# EAGLE board HomeAutomation (EAGLE 9.6.2)
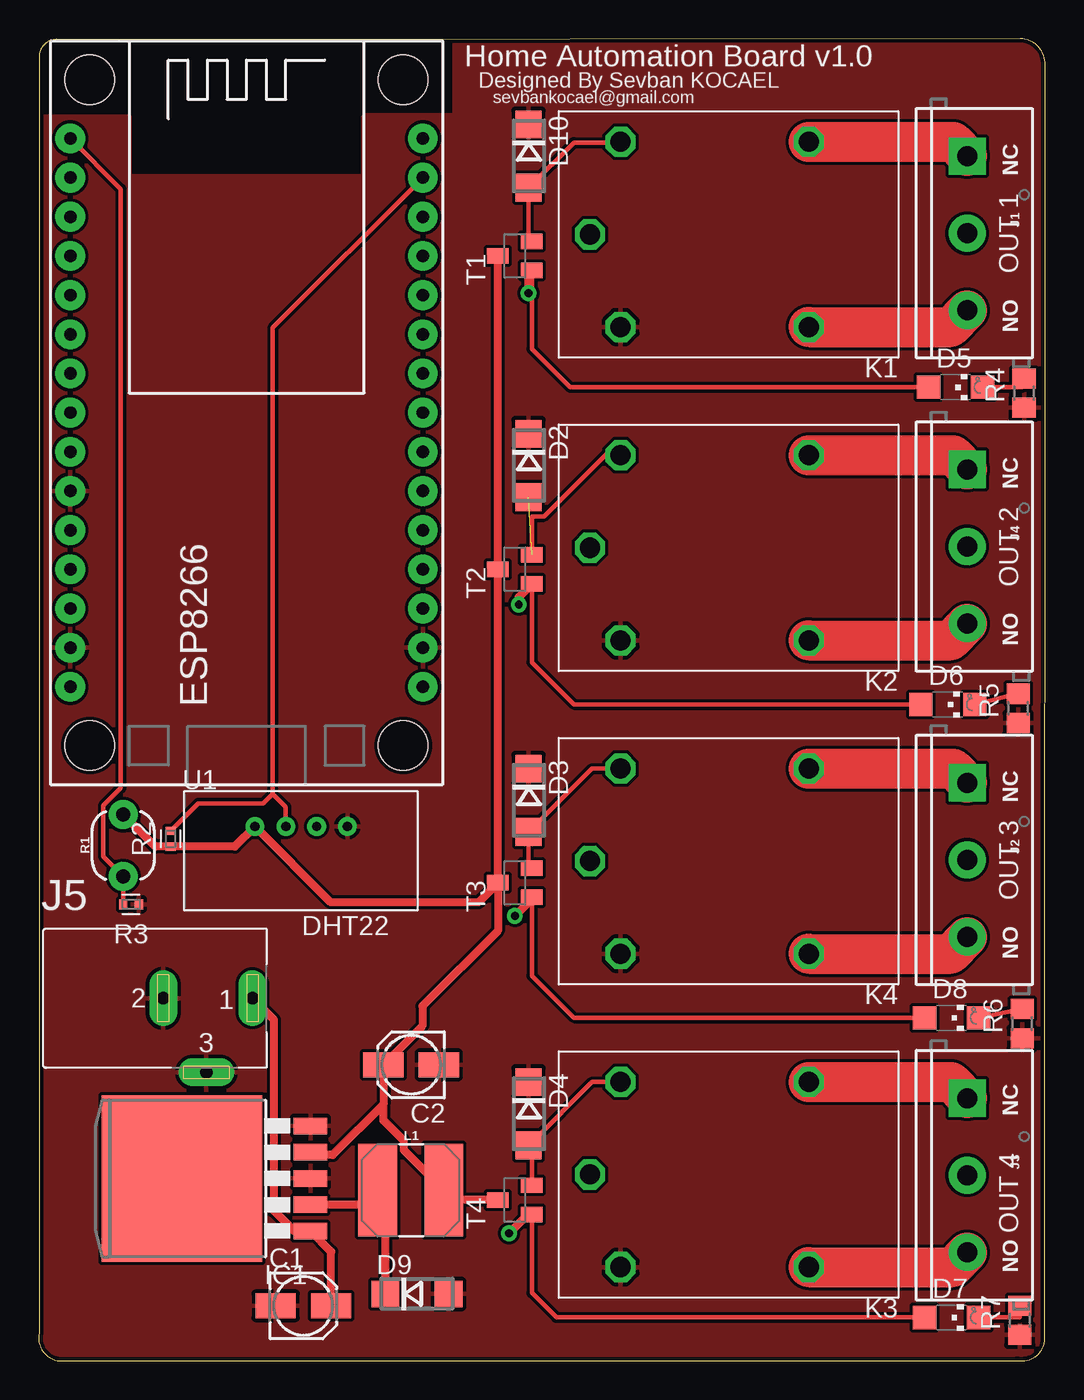
[diagram p0: board, top side]
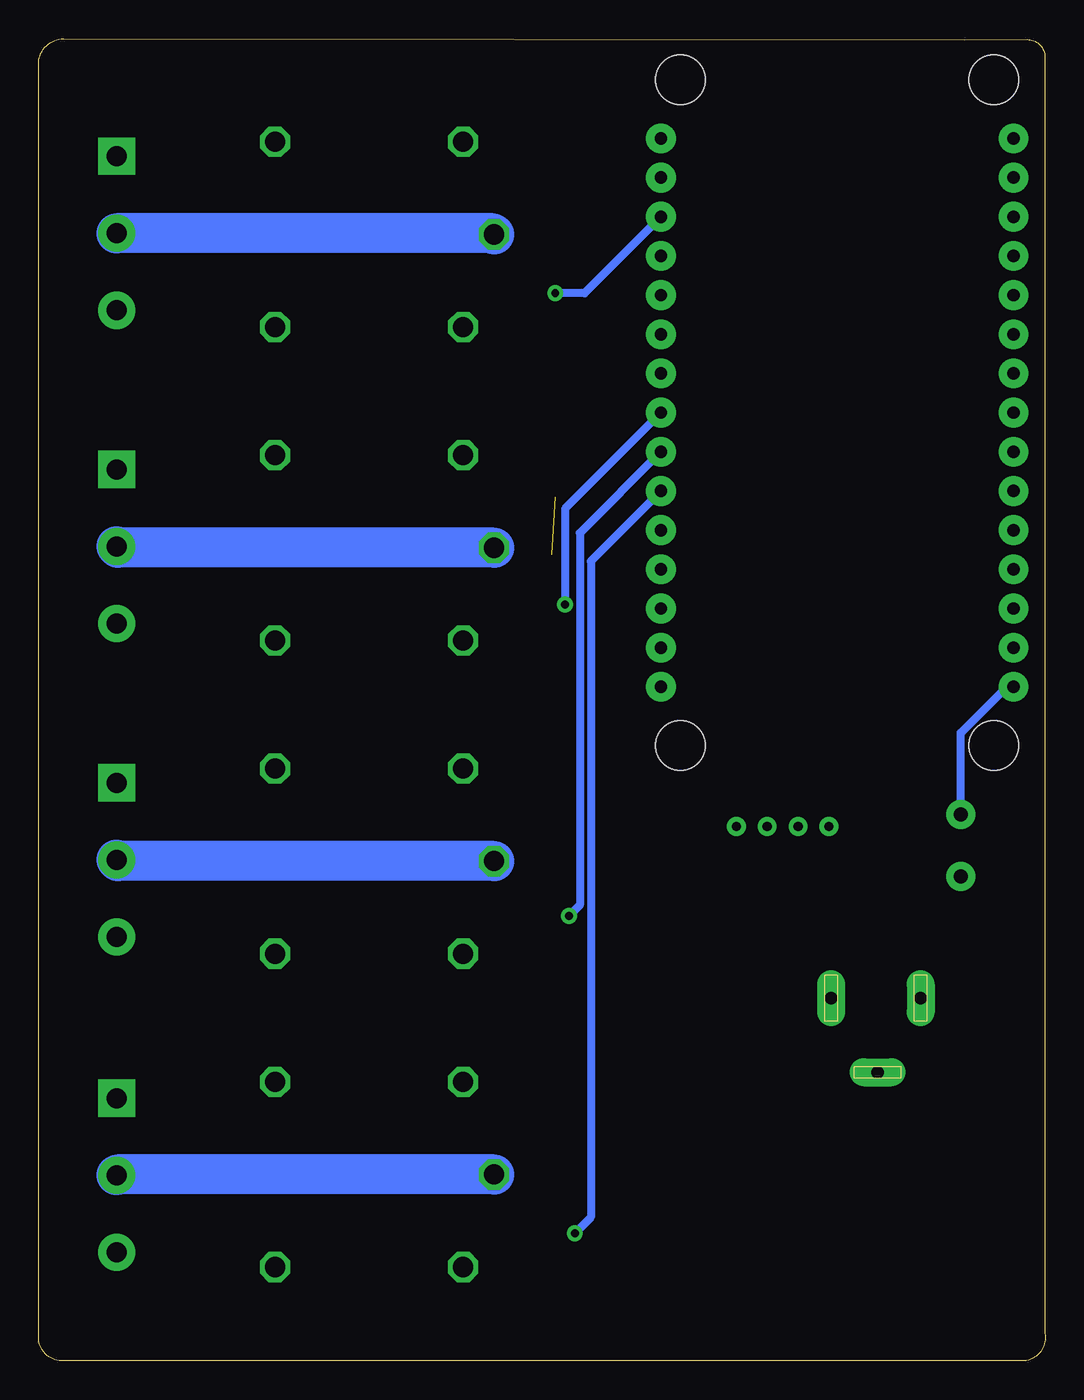
[diagram p1: board, bottom side, seen from below]

Size 65.29 x 85.75 mm. Coordinates in mm from the lower left corner, seen from the top.
Outline: 5.24,85.67 1.18,85.69 arc90 0.03,84.55 0.03,1.8 arc90 1.22,0.02 63.43,0.02 63.51,0.01 arc88 65.26,1.26 65.29,84.04 arc90 63.66,85.75 5.24,85.67
Copper layers (1*16): Top 0.035mm / dielectric 1.5mm / Bottom 0.035mm
Design rules "SparkFun": minimum track width 8mil, minimum drill 20mil, track to track 8mil, track to pad 8mil, pad to pad 8mil, via to via 8mil, smd to smd 8mil, copper to edge 10mil, drill to drill 8mil, minimum pad ring 12mil, minimum via ring 10mil, stop-mask expansion 4mil, vias tented up to drill 25mil, thermal gap 10mil

## Footprints (pad centres in the part's own frame; a part is rotated, then mirrored left to right if it is on the bottom)
153CLV-0405 = smd 2.6 x 1.6: + 1.8,0; - -1.8,0
DO214AC = smd 1.8 x 1.7: A 2.05,0; C -2.05,0
CHIPLED_1206 = smd 1.5 x 1.5: A 0,-1.75; C 0,1.75
ESP12E_DEVKIT = drill 0.8 pad 1.93: 3V3@0 -11.43,-7.62; 3V3@1 11.43,5.08; 3V3@2 11.43,-17.78; AD0 -11.43,17.78; CLK -11.43,-2.54; CMD -11.43,2.54; D0 11.43,17.78; D1 11.43,15.24; D2 11.43,12.7; D3 11.43,10.16; D4 11.43,7.62; D5 11.43,0; D6 11.43,-2.54; D7 11.43,-5.08; D8 11.43,-7.62; EN -11.43,-10.16; GND@0 -11.43,-5.08; GND@1 -11.43,-15.24; GND@2 11.43,2.54; GND@3 11.43,-15.24; RST -11.43,-12.7; RSV@0 -11.43,15.24; RSV@1 -11.43,12.7; RX 11.43,-10.16; SD0 -11.43,0; SD1 -11.43,5.08; SD2 -11.43,7.62; SD3 -11.43,10.16; TX 11.43,-12.7; VIN -11.43,-17.78 | hole 3.2: -10.16,21.59; 10.16,21.59; 10.16,-21.59; -10.16,-21.59
TO263-5 = smd 1.067 x 2.159: 1 -3.404,-5.791; 2 -1.702,-5.791; 3 0,-5.791; 4 1.702,-5.791; 5 3.404,-5.791 | smd 10.8 x 10.41: 6 0,2.54
SCREWTERMINAL-5MM-3 = drill 1.3 pad 2.413 square: 1 0,0 | drill 1.3 pad 2.413: 2 5,0; 3 10,0
694106301002 = drill 0.8 pad 1.8 long: 1 13.6,0; 2 7.8,0; 3 10.6,-4.8
SIEMENS_V23082_RELAY = drill 1.3 octagon: P$1 8,-6; P$2 8,6; P$3 10,0; P$4 -4.2,6; P$5 -4.2,-6
SRN6045 = smd 2.5 x 6: 1 -2.175,0; 2 2.125,0
PHOTOCELL-KIT = drill 0.9 pad 1.88: 1 -2,0; 2 2,0
RESC1005X40 = smd 0.535 x 0.644: 1 -0.507,0; 2 0.507,0
R0805 = smd 1.3 x 1.5: 1 -0.95,0; 2 0.95,0
SOT23-BEC = smd 1 x 1.4: B -0.95,-1.1; C 0,1.1; E 0.95,-1.1
DHT22 = drill 0.6: 1 -2,2; 2 0,2; 3 2,2; 4 4,2

## Placement (x,y rotation side)
C1  680uf  [153CLV-0405]  17.17,3.58 0 top
C2  220uF  [153CLV-0405]  24.16,19.2 180 top
D2  1N4007  [DO214AC]  31.78,58.06 270 top
D3  1N4007  [DO214AC]  31.78,36.34 270 top
D4  1N4007  [DO214AC]  31.78,16.02 270 top
D5  OUT 1  [CHIPLED_1206]  59.46,63.14 270 top
D6  OUT 2  [CHIPLED_1206]  58.96,42.57 270 top
D7  OUT 4  [CHIPLED_1206]  59.21,2.82 270 top
D8  OUT 3  [CHIPLED_1206]  59.21,22.25 270 top
D9  B340A-E3/61T  [DO214AC]  24.54,4.34 0 top
D10  1N4007  [DO214AC]  31.78,78.13 270 top
ESP8266  ESP12E_DEVKIT  [ESP12E_DEVKIT]  13.49,61.49 0 top
IC1  LM2596S  [TO263-5]  11.84,11.83 90 top
J1  OUT 1  [SCREWTERMINAL-5MM-3]  60.23,78.13 270 top
J2  OUT 3  [SCREWTERMINAL-5MM-3]  60.23,37.49 270 top
J3  OUT 4  [SCREWTERMINAL-5MM-3]  60.23,17.04 270 top
J4  OUT 2  [SCREWTERMINAL-5MM-3]  60.23,57.81 270 top
J5  694106301002  [694106301002]  0.28,23.52 0 top
K1  SIEMENS_V23082  [SIEMENS_V23082_RELAY]  45.75,73.05 180 top
K2  SIEMENS_V23082  [SIEMENS_V23082_RELAY]  45.75,52.73 180 top
K3  SIEMENS_V23082  [SIEMENS_V23082_RELAY]  45.75,12.09 180 top
K4  SIEMENS_V23082  [SIEMENS_V23082_RELAY]  45.75,32.41 180 top
L1  33µH/±20%/1.4A  [SRN6045]  24.16,11.07 0 top
R1  PHOTOCELLPTH-KIT  [PHOTOCELL-KIT]  5.49,33.42 90 top
R2  1k  [RESC1005X40]  8.56,33.85 90 top
R3  10k  [RESC1005X40]  6,29.61 180 top
R4  330  [R0805]  63.91,62.76 90 top
R5  330  [R0805]  63.53,42.31 90 top
R6  330  [R0805]  63.78,21.87 90 top
R7  330  [R0805]  63.63,2.64 90 top
T1  2N2222  [SOT23-BEC]  30.89,71.65 90 top
T2  2N2222  [SOT23-BEC]  30.89,51.33 90 top
T3  2N2222  [SOT23-BEC]  30.89,31.01 90 top
T4  2N2222  [SOT23-BEC]  30.89,10.44 90 top
U1  DHT22  [DHT22]  16.03,32.66 0 top

## Library data of the parts
C1 C2 = rcl; SPICEPREFIX: C
D2-D4 D9 D10 = diode
D5-D8 = led
ESP8266 = esp8266
IC1 = national-semiconductor; MF: NATIONAL SEMICONDUCTOR; MPN: LM2596S-ADJ/NOPB; OC_FARNELL: 9494367; OC_NEWARK: 41K3842
J1-J4 = SparkFun-Connectors; PROD_ID: CONN-10134; SF_SKU: PRT-08433
J5 = DC Power Jacks; CREATED_BY: PCBLayout.com; DIGIKEY_PART_NUMBER: 732-5930-ND; MANUFACTURER: Wurth Electronics Inc.; MPN: 694106301002
K1-K4 U1 = LezzetliRobotTarifleri
L1 = SparkFun-Coils; PROD_ID: NDUC-11627
R1 = SparkFun-Sensors; PROD_ID: COMP-09129; SF_ID: SEN-09088
R2 R3 = Resistor; CATEGORY: Resistor; SUB-CATEGORY: Fixed
R4-R7 = rcl; SPICEPREFIX: R
T1-T4 = transistor

## Nets
5V: C2.+ ESP8266.VIN IC1.4 L1.2 R1.2 R2.1 T1.C T2.C T3.C T4.C U1.1
A0: ESP8266.AD0 R1.1 R3.2
D1: ESP8266.D1 R2.2 U1.2
D2: D5.A ESP8266.D2 T1.B
D5: D6.A ESP8266.D5 T2.B
D6: D8.A ESP8266.D6 T3.B
D7: D7.A ESP8266.D7 T4.B
GND: C1.- C2.- D2.C D3.C D4.C D9.A D10.C ESP8266.GND@0 ESP8266.GND@1 ESP8266.GND@3 IC1.3 IC1.5 J5.2 J5.3 K1.P$2 K2.P$2 K3.P$2 K4.P$2 R3.1 R4.1 R5.1 R6.1 R7.1 U1.4
N$1: D10.A K1.P$1 T1.E
N$2: J2.1 K4.P$5
N$3: D2.A K2.P$1 T2.E
N$4: J2.2 K4.P$3
N$5: D3.A K4.P$1 T3.E
N$6: J2.3 K4.P$4
N$7: J3.1 K3.P$5
N$9: J3.2 K3.P$3
N$10: J3.3 K3.P$4
N$11: J4.1 K2.P$5
N$12: J4.2 K2.P$3
N$13: J4.3 K2.P$4
N$14: J1.3 K1.P$4
N$15: J1.2 K1.P$3
N$16: J1.1 K1.P$5
N$17: D5.C R4.2
N$18: D6.C R5.2
N$19: C1.+ IC1.1 J5.1
N$20: D8.C R6.2
N$21: D7.C R7.2
N$23: D9.C IC1.2 L1.1
N$26: D4.A K3.P$1 T4.E

## Tracks (layer width: path | path; a pad name or v marks a point on that pad's centre or on a via)
5V
  Top 0.508: 22.36,16.64 C2.+ 24.9,21.74 24.9,23.01 29.79,27.9 T3.C | 22.36,16.64 19.08,13.36 17.81,13.36 IC1.4 | T4.C 26.92,10.44 L1.2 23.69,13.66 23.69,14.26 22.36,15.59 22.36,16.64 | T3.C T2.C T1.C | T3.C 28.52,29.74 18.95,29.74 U1.1 12.72,33.35 R2.1 7.57,33.35 R1.2
  Bottom 0.508: R1.2 5.49,40.72 2.5,43.71 ESP8266.VIN
A0
  Top 0.305: R3.2 R1.1 4.19,32.72 4.19,36 5.34,37.15 5.34,75.99 ESP8266.AD0
  Top 0.508: R3.2
D1
  Top 0.305: ESP8266.D1 15.19,67 15.19,36.77 | 15.19,36.77 14.57,36.15 10.35,36.15 R2.2 | U1.2 16.03,35.93 15.19,36.77
D2  (via drill 0.51)
  Top 0.305: T1.B 31.99,65.62 34.47,63.14 D5.A
  Top 0.508: v31.78,69.24 31.78,70.49 T1.B
  Bottom 0.508: ESP8266.D2 29.87,69.24 v31.78,69.24
D5  (via drill 0.51)
  Top 0.305: T2.B 31.99,45.3 34.72,42.57 D6.A
  Top 0.508: v31.14,49.04 31.14,49.53 T2.B
  Bottom 0.508: ESP8266.D5 31.14,55.27 v31.14,49.04
D6  (via drill 0.51)
  Top 0.305: T3.B 31.99,24.98 34.72,22.25 D8.A
  Top 0.508: v30.89,28.85 31.99,29.95 T3.B
  Bottom 0.508: ESP8266.D6 30.18,53.69 30.18,29.56 v30.89,28.85
D7  (via drill 0.51)
  Top 0.305: T4.B 31.99,4.41 33.58,2.82 D7.A
  Top 0.508: v30.51,8.28 31.72,9.49 T4.B
  Bottom 0.508: ESP8266.D7 29.47,51.86 29.47,9.32 v30.51,8.28
GND
  pour Top: -1.24,80.67 -1.22,80.69 5.9,80.69 5.9,76.88 5.97,76.81 20.98,76.81 21.03,76.86 21.03,80.64 21.16,80.77 26.85,80.77 26.98,80.64 26.98,86.99 26.8,87.17 64.65,87.17 66.07,85.75 66.07,0.66 64.8,-0.61 -1.24,-0.61
N$1
  Top 0.305: T1.E 31.78,72.81 D10.A 34.71,79.01 37.71,79.01 K1.P$1
N$2
  Top 2.591: K4.P$5 59.31,38.41 J2.1
N$3  (1 unrouted)
  Top 0.305: T2.E 31.99,54.75 32.78,54.75 36.83,58.81 37.66,58.81 K2.P$1
N$4
  Bottom 2.591: K4.P$3 60.15,32.41 J2.2
N$5
  Top 0.305: K4.P$1 35.89,38.41 D3.A 31.78,32.17 T3.E
N$6
  Top 2.591: K4.P$4 59.15,26.41 J2.3
N$7
  Top 2.591: K3.P$5 59.18,18.09 J3.1
N$9
  Bottom 2.591: K3.P$3 60.18,12.09 J3.2
N$10
  Top 2.591: K3.P$4 59.27,6.09 J3.3
N$11
  Top 2.591: K2.P$5 59.31,58.73 J4.1
N$12
  Bottom 2.591: K2.P$3 60.15,52.73 J4.2
N$13
  Top 2.591: K2.P$4 59.15,46.73 J4.3
N$14
  Top 2.591: K1.P$4 59.15,67.05 J1.3
N$15
  Bottom 2.591: K1.P$3 35.83,73.13 J1.2
N$16
  Top 2.591: K1.P$5 59.31,79.05 J1.1
N$17
  Top 0.305: D5.C 63.78,63.14 R4.2
N$18
  Top 0.305: D6.C R5.2
N$19
  Top 0.508: C1.+ 18.97,7.09 IC1.1 16.57,8.43 15.27,9.73 15.27,22.13 J5.1
N$20
  Top 0.305: R6.2 D8.C
N$21
  Top 0.305: D7.C 63.63,2.82 R7.2
N$23
  Top 0.305: L1.1 21.67,10.76 21.3,10.38 21.04,10.13
  Top 0.508: D9.C 22.49,9.95 21.67,10.76 | L1.1 21.3,10.38 | 21.04,10.13 IC1.2
N$26
  Top 0.305: D4.A 31.99,14.18 | 31.99,14.18 35.89,18.09 K3.P$1 | T4.E 31.99,14.18

## Text on the board
tPlace: Home Automation Board v1.0 | Designed By Sevban KOCAEL | sevbankocael@gmail.com | NC | OUT 1 | NO | NC | OUT 2 | NO | NC | OUT 3 | DHT22 | NO | NC | OUT 4 | NO
tStop: Designed By Sevban KOCAEL